# EAGLE board T61 (EAGLE 9.6.2)
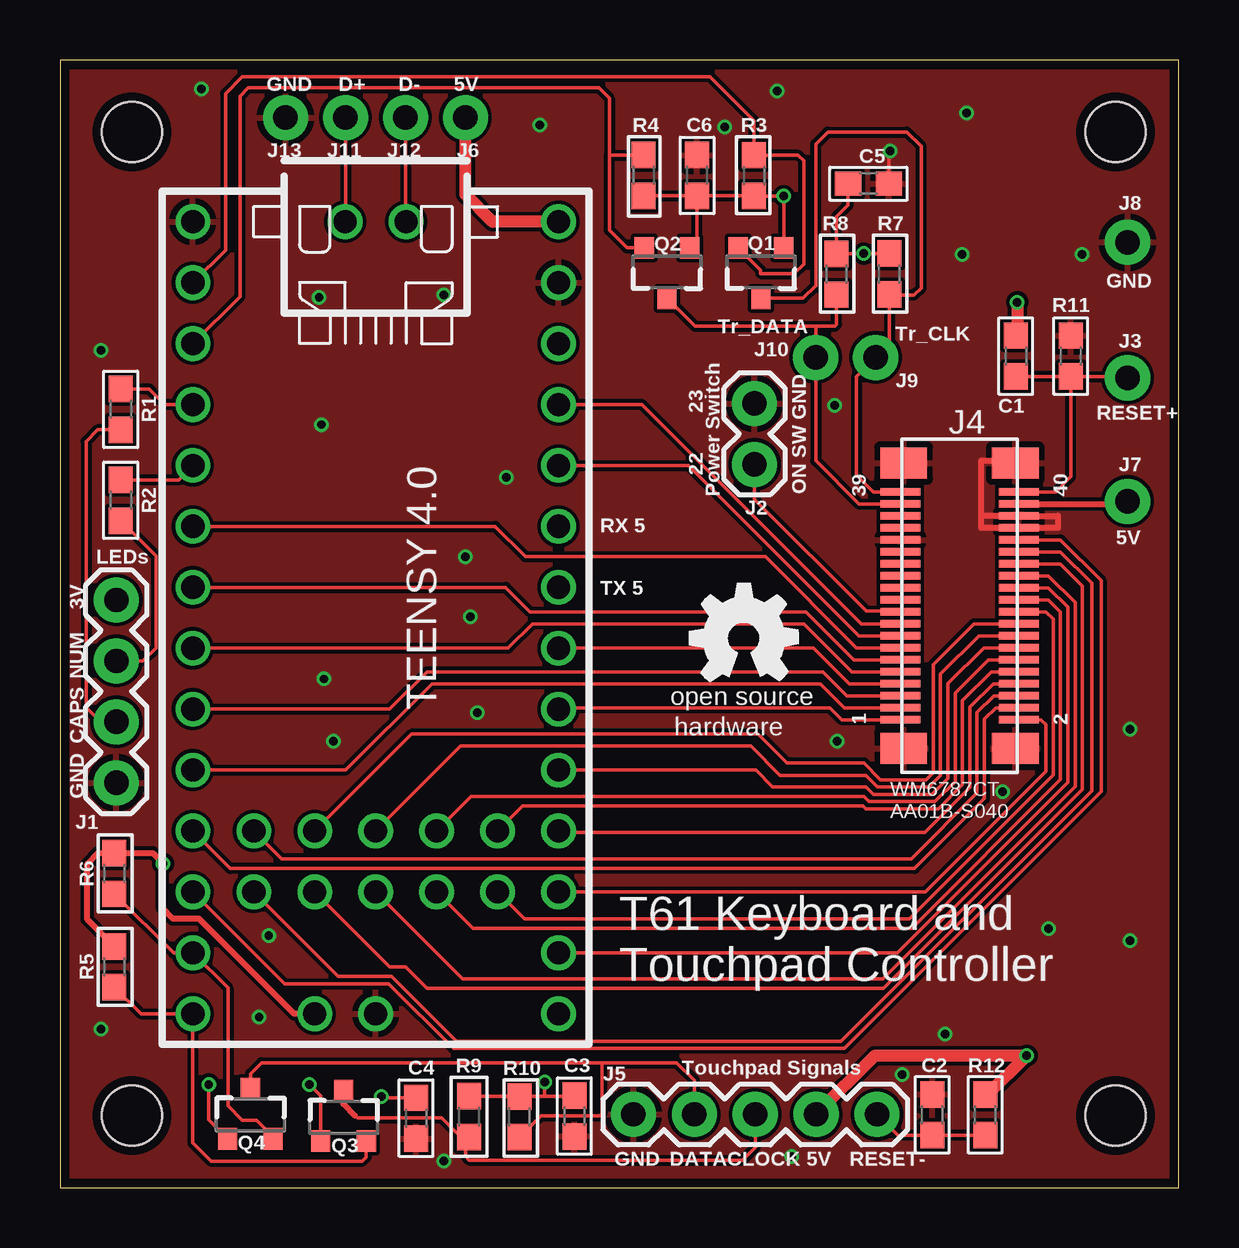
[diagram p0: board, top side]
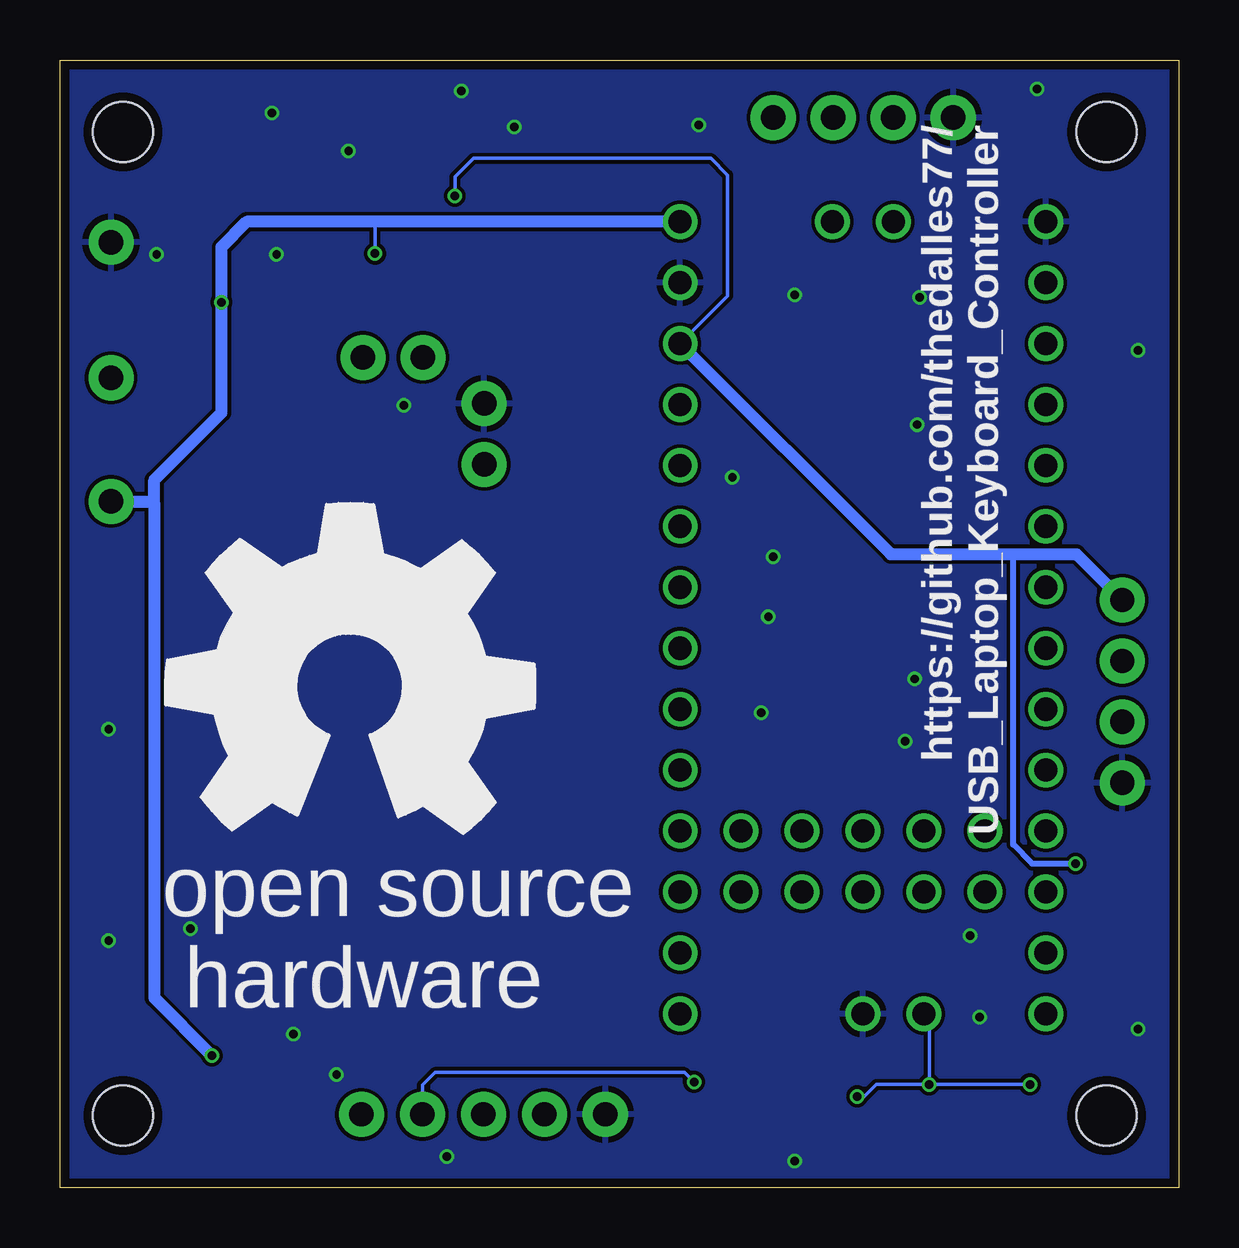
[diagram p1: board, bottom side, seen from below]

Size 46.63 x 47 mm. Coordinates in mm from the lower left corner, seen from the top.
Outline: 0,0 46.63,0 46.63,47 0,47 0,0
Copper layers (1*16): Top 0.035559375mm / dielectric 1.6mm / Bottom 0.035559375mm
Design rules "oshpark-2layer": minimum track width 6mil, minimum drill 10mil, track to track 6mil, track to pad 6mil, pad to pad 6mil, via to via 6mil, smd to smd 6mil, copper to edge 15mil, drill to drill 6mil, minimum pad ring 5mil, minimum via ring 5mil, stop-mask expansion 2.5mil, vias tented up to drill 0mil, thermal gap 10mil
Holes 2.5 mm at 3,3 44,3 44,44 3,44

## Footprints (pad centres in the part's own frame; a part is rotated, then mirrored left to right if it is on the bottom)
0603_CAP = smd 1.1 x 1: 1 -0.85,0; 2 0.85,0
1X04 = drill 1.016 pad 1.88: 1 0,0; 2 2.54,0; 3 5.08,0; 4 7.62,0
1X02 = drill 1.016 pad 1.88: 1 0,0; 2 2.54,0
1X01_NO_SILK = drill 1.016 pad 1.88: 1 0,0
WM6787_AA01B = smd 0.3 x 1.65: P$1 -4.7,2.57; P$2 -4.7,-2.37; P$3 -4.2,2.57; P$4 -4.2,-2.37; P$5 -3.7,2.57; P$6 -3.7,-2.37; P$7 -3.2,2.57; P$8 -3.2,-2.37; P$9 -2.7,2.57; P$10 -2.7,-2.37; P$11 -2.2,2.57; P$12 -2.2,-2.37; P$13 -1.7,2.57; P$14 -1.7,-2.37; P$15 -1.2,2.57; P$16 -1.2,-2.37; P$17 -0.7,2.57; P$18 -0.7,-2.37; P$19 -0.2,2.57; P$20 -0.2,-2.37; P$21 0.3,2.57; P$22 0.3,-2.37; P$23 0.8,2.57; P$24 0.8,-2.37; P$25 1.3,2.57; P$26 1.3,-2.37; P$27 1.8,2.57; P$28 1.8,-2.37; P$29 2.3,2.57; P$30 2.3,-2.37; P$31 2.8,2.57; P$32 2.8,-2.37; P$33 3.3,2.57; P$34 3.3,-2.37; P$35 3.8,2.57; P$36 3.8,-2.37; P$37 4.3,2.57; P$38 4.3,-2.37; P$39 4.8,2.57; P$40 4.8,-2.37 | smd 1.3 x 1.95: TAB1 -5.9,2.43; TAB2 -5.9,-2.22; TAB3 6,2.43; TAB4 6,-2.22
1X05 = drill 1.016 pad 1.88: 1 0,0; 2 2.54,0; 3 5.08,0; 4 7.62,0; 5 10.16,0
SOT23-3 = smd 0.8 x 0.9: 1 -0.95,-1; 2 0.95,-1; 3 0,1.1
0603 = smd 1.1 x 1: 1 -0.85,0; 2 0.85,0
0603_RESISTOR = smd 1.1 x 1: 1 -0.85,0; 2 0.85,0
TEENSY4P0 = drill 0.965: 0 -12.7,-7.62; 1 -10.16,-7.62; 2 -7.62,-7.62; 3 -5.08,-7.62; 3V -10.16,7.62; 3V1 17.78,-2.54; 4 -2.54,-7.62; 5 0,-7.62; 5V -15.24,7.62; 6 2.54,-7.62; 7 5.08,-7.62; 8 7.62,-7.62; 9 10.16,-7.62; 10 12.7,-7.62; 11 15.24,-7.62; 12 17.78,-7.62; 13 17.78,7.62; 14 15.24,7.62; 15 12.7,7.62; 16 10.16,7.62; 17 7.62,7.62; 18 5.08,7.62; 19 2.54,7.62; 20 0,7.62; 21 -2.54,7.62; 22 -5.08,7.62; 23 -7.62,7.62; 24 12.7,5.08; 25 10.16,5.08; 26 12.7,2.54; 27 10.16,2.54; 28 12.7,0; 29 10.16,0; 30 12.7,-2.54; 31 10.16,-2.54; 32 12.7,-5.08; 33 10.16,-5.08; D+ -15.24,-1.27; D- -15.24,1.27; GND1 -15.24,-7.62; GND2 -12.7,7.62; GND3 17.78,0

## Placement (x,y rotation side)
C1  2.2UF  [0603_CAP]  39.84,34.66 270 top
C2  2.2UF  [0603_CAP]  36.36,3.03 90 top
C3  0.1uf  [0603_CAP]  21.44,2.98 270 top
C4  0.1uf  [0603_CAP]  14.84,2.89 270 top
C5  0.1uf  [0603_CAP]  33.7,41.84 0 top
C6  0.1uf  [0603_CAP]  26.56,42.19 90 top
J1  LEDs  [1X04]  2.35,16.87 90 top
J2  Power Switch  [1X02]  28.95,32.68 270 top
J3  RESET+  [1X01_NO_SILK]  44.5,33.75 0 top
J4  AA01B-S040  [WM6787_AA01B]  37.6,24.2 90 top
J5  Touchpad_Signals  [1X05]  23.9,3.05 0 top
J6  5V  [1X01_NO_SILK]  16.9,44.6 0 top
J7  5V  [1X01_NO_SILK]  44.5,28.6 0 top
J8  GND  [1X01_NO_SILK]  44.5,39.4 0 top
J9  TP_CLK  [1X01_NO_SILK]  34,34.6 0 top
J10  TP_DATA  [1X01_NO_SILK]  31.5,34.6 0 top
J11  D+  [1X01_NO_SILK]  11.9,44.6 0 top
J12  D-  [1X01_NO_SILK]  14.4,44.6 0 top
J13  GND  [1X01_NO_SILK]  9.4,44.6 0 top
Q1  220mA/50V/3.5Ω  [SOT23-3]  29.22,38.17 180 top
Q2  220mA/50V/3.5Ω  [SOT23-3]  25.3,38.17 180 top
Q3  220mA/50V/3.5Ω  [SOT23-3]  11.82,2.93 0 top
Q4  220mA/50V/3.5Ω  [SOT23-3]  7.94,3.03 0 top
R1  715  [0603]  2.53,32.44 270 top
R2  715  [0603]  2.53,28.65 270 top
R3  4.7k  [0603]  28.93,42.18 270 top
R4  4.7k  [0603]  24.33,42.19 270 top
R5  4.7k  [0603]  2.27,9.2 90 top
R6  4.7k  [0603]  2.27,13.09 90 top
R7  4.7k  [0603]  34.57,38.08 90 top
R8  4.7k  [0603]  32.37,38.07 90 top
R9  4.7k  [0603]  17.06,2.96 90 top
R10  4.7k  [0603]  19.16,2.95 90 top
R11  100K  [0603_RESISTOR]  42.13,34.66 270 top
R12  17K  [0603_RESISTOR]  38.57,3.03 90 top
U1  TEENSY4P0  [TEENSY4P0]  13.16,25.02 270 top
U$1  [OSHW_5MM]  28.5,22.9 0 top
U$2  [OSHW_16MM]  34.5,20.9 0 top

## Library data of the parts
C1-C6 = 0603_CAP
J1 = SparkFun-Connectors; PROD_ID: CONN-09696
J2 J3 J5-J13 = SparkFun-Connectors
J4 = WM6787_A01B
Q1-Q4 = SparkFun-DiscreteSemi; PROD_ID: TRANS-00830
R1 R2 = SparkFun-Resistors; PROD_ID: RES-07850
R3-R10 = SparkFun-Resistors; PROD_ID: RES-07857
R11 R12 = 0603_RESISTOR
U1 = TEENSY4P0
U$1 = oshw
U$2 = oshw_backside

## Nets
0: Q1.2 R3.1 U1.0
1: Q2.2 R4.1 U1.1
2: R1.1 U1.2
3: R2.1 U1.3
3V: C4.1 C6.1 J1.4 Q1.1 Q2.1 Q3.1 Q4.1 R3.2 R4.2 R5.2 R6.2 U1.3V U1.3V1
4: J4.P$13 U1.4
5: J4.P$11 U1.5
5V: C1.1 C3.1 C5.1 J4.P$38 J5.4 J6.1 J7.1 R7.2 R8.2 R9.2 R10.2 R12.2 U1.5V
6: J4.P$9 U1.6
7: J4.P$5 U1.7
8: J4.P$3 U1.8
9: J4.P$4 U1.9
10: J4.P$32 U1.10
11: Q4.2 R6.1 U1.11
12: Q3.2 R5.1 U1.12
13: U1.13
14: J4.P$24 U1.14
15: J4.P$2 U1.15
16: J4.P$8 U1.16
17: J4.P$14 U1.17
18: J4.P$1 U1.18
19: J4.P$7 U1.19
20: U1.20
21: U1.21
22: J4.P$15 U1.22
23: J4.P$17 U1.23
24: J4.P$20 U1.24
25: J4.P$10 U1.25
26: J4.P$22 U1.26
27: J4.P$12 U1.27
28: J4.P$26 U1.28
29: J4.P$16 U1.29
30: J4.P$28 U1.30
31: J4.P$18 U1.31
32: J4.P$30 U1.32
33: J4.P$6 U1.33
CAPS_LOCK: J1.2 R1.2
D+: J11.1 U1.D+
D-: J12.1 U1.D-
GND: C2.2 C3.2 C4.2 C5.2 C6.2 J1.1 J2.1 J4.P$31 J4.P$34 J4.P$36 J4.TAB1 J4.TAB2 J4.TAB3 J4.TAB4 J5.1 J8.1 J13.1 R11.1 U1.GND1 U1.GND2 U1.GND3
NUM_LOCK: J1.3 R2.2
ON: J2.2 J4.P$19
PAD_CLOCK: J5.3 Q3.3 R9.1
PAD_DATA: J5.2 Q4.3 R10.1
RESET+: C1.2 J3.1 J4.P$40 R11.2
RESET-: C2.1 J5.5 R12.1
TP_CLK: J4.P$39 J9.1 Q1.3 R7.1
TP_DATA: J4.P$37 J10.1 Q2.3 R8.1

## Tracks (layer width: path | path; a pad name or v marks a point on that pad's centre or on a via)
0
  Top 0.152: U1.0 6.9,39.08 6.9,45.6 7.6,46.3 27.1,46.3 28.93,44.47 R3.1 30.77,43.03 31,42.8 31,38.5 30.6,38.1 29.2,38.1 29.2,38.24 Q1.2
1
  Top 0.152: U1.1 7.5,37.14 7.5,45.5 7.84,45.84 22.46,45.84 22.9,45.4 22.9,43.04 | 22.9,43.04 R4.1 | Q2.2 23.63,39.17 22.9,39.9 22.9,43.04
2
  Top 0.152: U1.2 4.36,32.64 3.71,33.29 R1.1
3
  Top 0.152: U1.3 4.94,29.5 R2.1
3V  (via drill 0.35)
  Top 0.152: R4.2 C6.1 | C6.1 R3.2 v30.17,41.33 Q1.1 | Q2.1 26.56,39.48 C6.1 | Q3.1 10.87,3.83 v10.4,4.3 | Q4.1 6.2,2.82 v6.2,4.3 | C4.1 14.2,3.74 14.14,3.74 13.46,3.74 v13.4,3.8
  Top 0.254: R5.2 1.14,11.18 1.14,13.5 1.58,13.94 R6.2 3.86,13.94 4.25,13.55 | 4.25,13.55 v4.3,13.5 | U1.3V1 9.76,7.24 5.8,11.2 4.7,11.2 4.25,11.65 4.25,13.55
  Bottom 0.152: v30.17,41.33 30.17,42.13 29.4,42.9 19.5,42.9 18.8,42.2 18.8,37.16 U1.3V | v10.4,4.3 10.4,7.02 U1.3V1 | v6.2,4.3 v10.4,4.3 | v13.4,3.8 13.1,3.8 12.6,4.3 v10.4,4.3
  Bottom 0.254: v4.3,13.5 6.1,13.5 6.9,14.3 6.9,26.4
  Bottom 0.508: U1.3V 12,26.4 6.9,26.4 4.26,26.4 J1.4
4
  Top 0.152: U1.4 18.14,27.56 19.4,26.3 29.4,26.3 33.2,22.5 J4.P$13
5
  Top 0.152: U1.5 18.58,25.02 19.6,24 22.5,24 22.6,24 31.1,24 33.1,22 J4.P$11
5V  (via drill 0.35)
  Top 0.152: R7.2 v33.5,38.93 R8.2 32.37,40.47 32.85,40.95 C5.1 | C3.1 21.41,3.8 20.2,3.8 | 20.2,3.8 R10.2 R9.2 | 20.2,3.8 v20.2,4.4 | 38.6,3.88 R12.2
  Top 0.254: 39.9,35.57 C1.1 | 38.68,3.88 38.6,3.88 | J7.1 44.4,28.5 J4.P$38
  Top 0.508: v39.9,36.9 39.9,35.57 | 38.68,3.88 v40.3,5.5 33.97,5.5 J5.4 | U1.5V 18.04,40.26 16.9,41.4 J6.1
  Bottom 0.152: v20.2,4.4 20.6,4.8 31,4.8 31.52,4.28 J5.4 | v33.5,38.93 33.5,40.26
  Bottom 0.508: U1.5V 33.5,40.26 38.84,40.26 39.9,39.2 v39.9,36.9 39.9,32.3 42.7,29.5 42.7,28.5 | v40.3,5.5 42.7,7.9 42.7,28.5 | J7.1 42.8,28.6 42.7,28.5
6
  Top 0.152: U1.6 18.68,22.48 19.7,23.5 31,23.5 33,21.5 J4.P$9
7
  Top 0.152: U1.7 13.74,19.94 15.3,21.5 31.8,21.5 32.8,20.5 J4.P$5
8
  Top 0.152: U1.8 11.9,17.4 15.5,21 31.7,21 32.7,20 J4.P$3
9
  Top 0.152: U1.9 7.1,13.3 35.62,13.3 38.53,16.22 38.53,19.53 39,20 J4.P$4
10
  Top 0.152: U1.10 9.36,8.5 13.7,8.5 16.41,5.79 32.69,5.79 43.4,16.51 43.4,25.3 41.7,27 J4.P$32
11
  Top 0.152: R6.1 4.73,9.78 U1.11 7,8.32 7,3.4 7.6,2.8 8.2,2.8 8.89,2.11 Q4.2
12
  Top 0.152: R5.1 3.38,7.24 U1.12 5.54,1.86 6.3,1.1 12.6,1.1 12.77,1.27 Q3.2
14
  Top 0.152: J4.P$24 41.2,25 42.01,24.19 42.01,16.88 34.91,9.78 U1.14
15
  Top 0.152: U1.15 36.07,12.32 41.09,17.35 41.09,19.3 40.9,19.5 J4.P$2
16
  Top 0.152: U1.16 20.84,14.8 36.05,14.8 37.92,16.67 37.92,20.02 38.9,21 J4.P$8
17
  Top 0.152: J4.P$14 38.5,22.5 37.01,21.01 37.01,17.05 36.35,16.39 33.91,16.39 33.6,16.7 29.7,16.7 29,17.4 U1.17
18
  Top 0.152: U1.18 20.84,20 32.1,20 32.6,19.5 J4.P$1
19
  Top 0.152: U1.19 22.68,22.48 22.7,22.5 31.4,22.5 32.9,21 J4.P$7
22
  Top 0.152: U1.22 26.2,30.1 33.3,23 J4.P$15
23
  Top 0.152: J4.P$17 33.4,23.5 24.26,32.64 U1.23
24
  Top 0.152: U1.24 19.36,11.2 35.4,11.2 41.4,17.2 41.4,23.7 41.1,24 J4.P$20
25
  Top 0.152: U1.25 19.28,15.9 33.47,15.9 33.59,15.78 36.6,15.78 37.62,16.8 37.62,20.3 38.82,21.5 J4.P$10
26
  Top 0.152: U1.26 17.22,10.8 35.5,10.8 41.7,17 41.7,24 41.2,24.5 J4.P$22
27
  Top 0.152: U1.27 17.14,16.3 33.5,16.3 33.71,16.09 36.48,16.09 37.31,16.92 37.31,20.61 38.7,22 J4.P$12
28
  Top 0.152: U1.28 16.78,8.7 34.3,8.7 42.31,16.71 42.31,24.39 41.2,25.5 J4.P$26
29
  Top 0.152: U1.29 16.7,18.4 28.8,18.4 30.02,17.18 33.58,17.18 34.07,16.7 36.23,16.7 36.7,17.17 36.7,21.41 38.3,23 J4.P$16
30
  Top 0.152: U1.30 13.74,9.2 14.4,9.2 15.3,8.3 34.33,8.3 42.62,16.59 42.62,25.08 41.7,26 J4.P$28
31
  Top 0.152: U1.31 14.66,18.9 29.1,18.9 30.3,17.7 33.5,17.7 34.2,17 36.1,17 36.4,17.3 36.4,21.8 38.1,23.5 J4.P$18
32
  Top 0.152: U1.32 11.6,8.8 13.83,8.8 16.53,6.1 32.56,6.1 43,16.54 43,25.2 41.7,26.5 J4.P$30
33
  Top 0.152: U1.33 9.24,13.7 35.49,13.7 38.23,16.44 38.23,19.8 38.93,20.5 J4.P$6
CAPS_LOCK
  Top 0.152: R1.2 1.58,31.59 1.09,31.1 1.09,20.01 1.69,19.41 J1.2
D+
  Top 0.152: J11.1 U1.D+
D-
  Top 0.152: J12.1 14.4,40.29 U1.D-
GND  (via drill 0.35)
  Top 0.152: C5.2 34.55,43.2 v34.6,43.2
  Top 0.254: 38.4,28 38.4,27.5 J4.P$34 41.6,27.5 41.6,28 J4.P$36 38.4,28 | 38.4,28 38.4,30.3 40.04,30.3 J4.TAB4
  other vias: 39.3,16.5 32.4,18.6 41.2,10.8 36.9,6.4 44.6,19.1 44.6,10.3 30.5,1.3 37.6,38.9 42.6,38.9 37.8,44.8 29.9,45.7 1.7,34.9 1.7,6.6 16,1.1 18.6,29.6 16.9,26.3 17.1,23.8 11,21.2 11.4,18.6 17.4,19.8 8.7,10.5 8.3,7.1 35.1,4.7 27.7,44.2 32.3,32.6 20,44.3 16,37.2 10.8,37.1 10.9,31.8 5.9,45.8
  pour Top: 0.1,0 0.1,46.8 46.6,46.8 46.6,0
  pour Bottom: 0,0 0,46.9 46.6,46.9 46.6,0
NUM_LOCK
  Top 0.152: R2.2 4,26.33 4,22.5 3.45,21.95 J1.3
ON
  Top 0.152: J4.P$19 34.73,24.02 33.6,24.02 28.95,28.68 J2.2
PAD_CLOCK
  Top 0.152: 12.3,3 12.4,2.9 15.9,2.9 16.69,2.11 16.9,2.11 | 16.9,2.11 R9.1 | 16.9,2.11 16.9,1.3 17.06,1.14 28.44,1.14 28.98,1.68 J5.3
  Top 0.254: Q3.3 11.82,3.48 12.3,3
PAD_DATA
  Top 0.152: Q4.3 7.94,4.74 8.4,5.2 22.6,5.2 | 22.6,5.2 25.7,5.2 26.44,4.46 J5.2 | R10.1 20.06,3 22.5,3 22.6,3.1 22.6,5.2
RESET+
  Top 0.152: J4.P$40 41.5,29 42.13,29.63 R11.2 | R11.2 C1.2 | R11.2 44.34,33.81 J3.1
RESET-
  Top 0.152: R12.1 C2.1 34.93,2.18 J5.5
TP_CLK
  Top 0.152: Q1.3 30.97,37.07 31.5,37.6 31.5,43.5 32,44 35.3,44 35.9,43.4 35.9,37.5 35.6,37.2 34.6,37.2 R7.1 34.57,35.17 J9.1 33.2,33.8 33.2,29.7 33.9,29 J4.P$39
TP_DATA
  Top 0.152: Q2.3 26.47,35.9 31.5,35.9 | R8.1 32.37,35.97 32.3,35.9 31.5,35.9 | J4.P$37 33.3,28.5 31.5,30.3 J10.1 31.5,35.9

## Text on the board
tPlace: GND | D+ | D- | 5V | C6 | C5 | GND | Tr_DATA | Tr_CLK | C1 | 23 | GND | RESET+ | 22 | Power Switch | ON SW | RX 5 | 5V | LEDs | TX 5 | 3V | NUM | CAPS | GND | WM6787CT / AA01B-S040 | T61 Keyboard and / Touchpad Controller | C4 | C3 | Touchpad Signals | C2 | GND | DATA | CLOCK | 5V | RESET-
bPlace: https://github.com/thedalles77/ / USB_Laptop_Keyboard_Controller